# Altium PCB 1819_Emmeteur_DCF.PcbDoc (part 1 of 2)
Units mm, origin at the board's own origin, x right, y up, seen from the top; angles counter-clockwise.
Board outline 107.7 x 106.68 mm, 2 copper layers (Top Layer, Bottom Layer); 106 components, 76 nets, 407 pads, 175 vias.
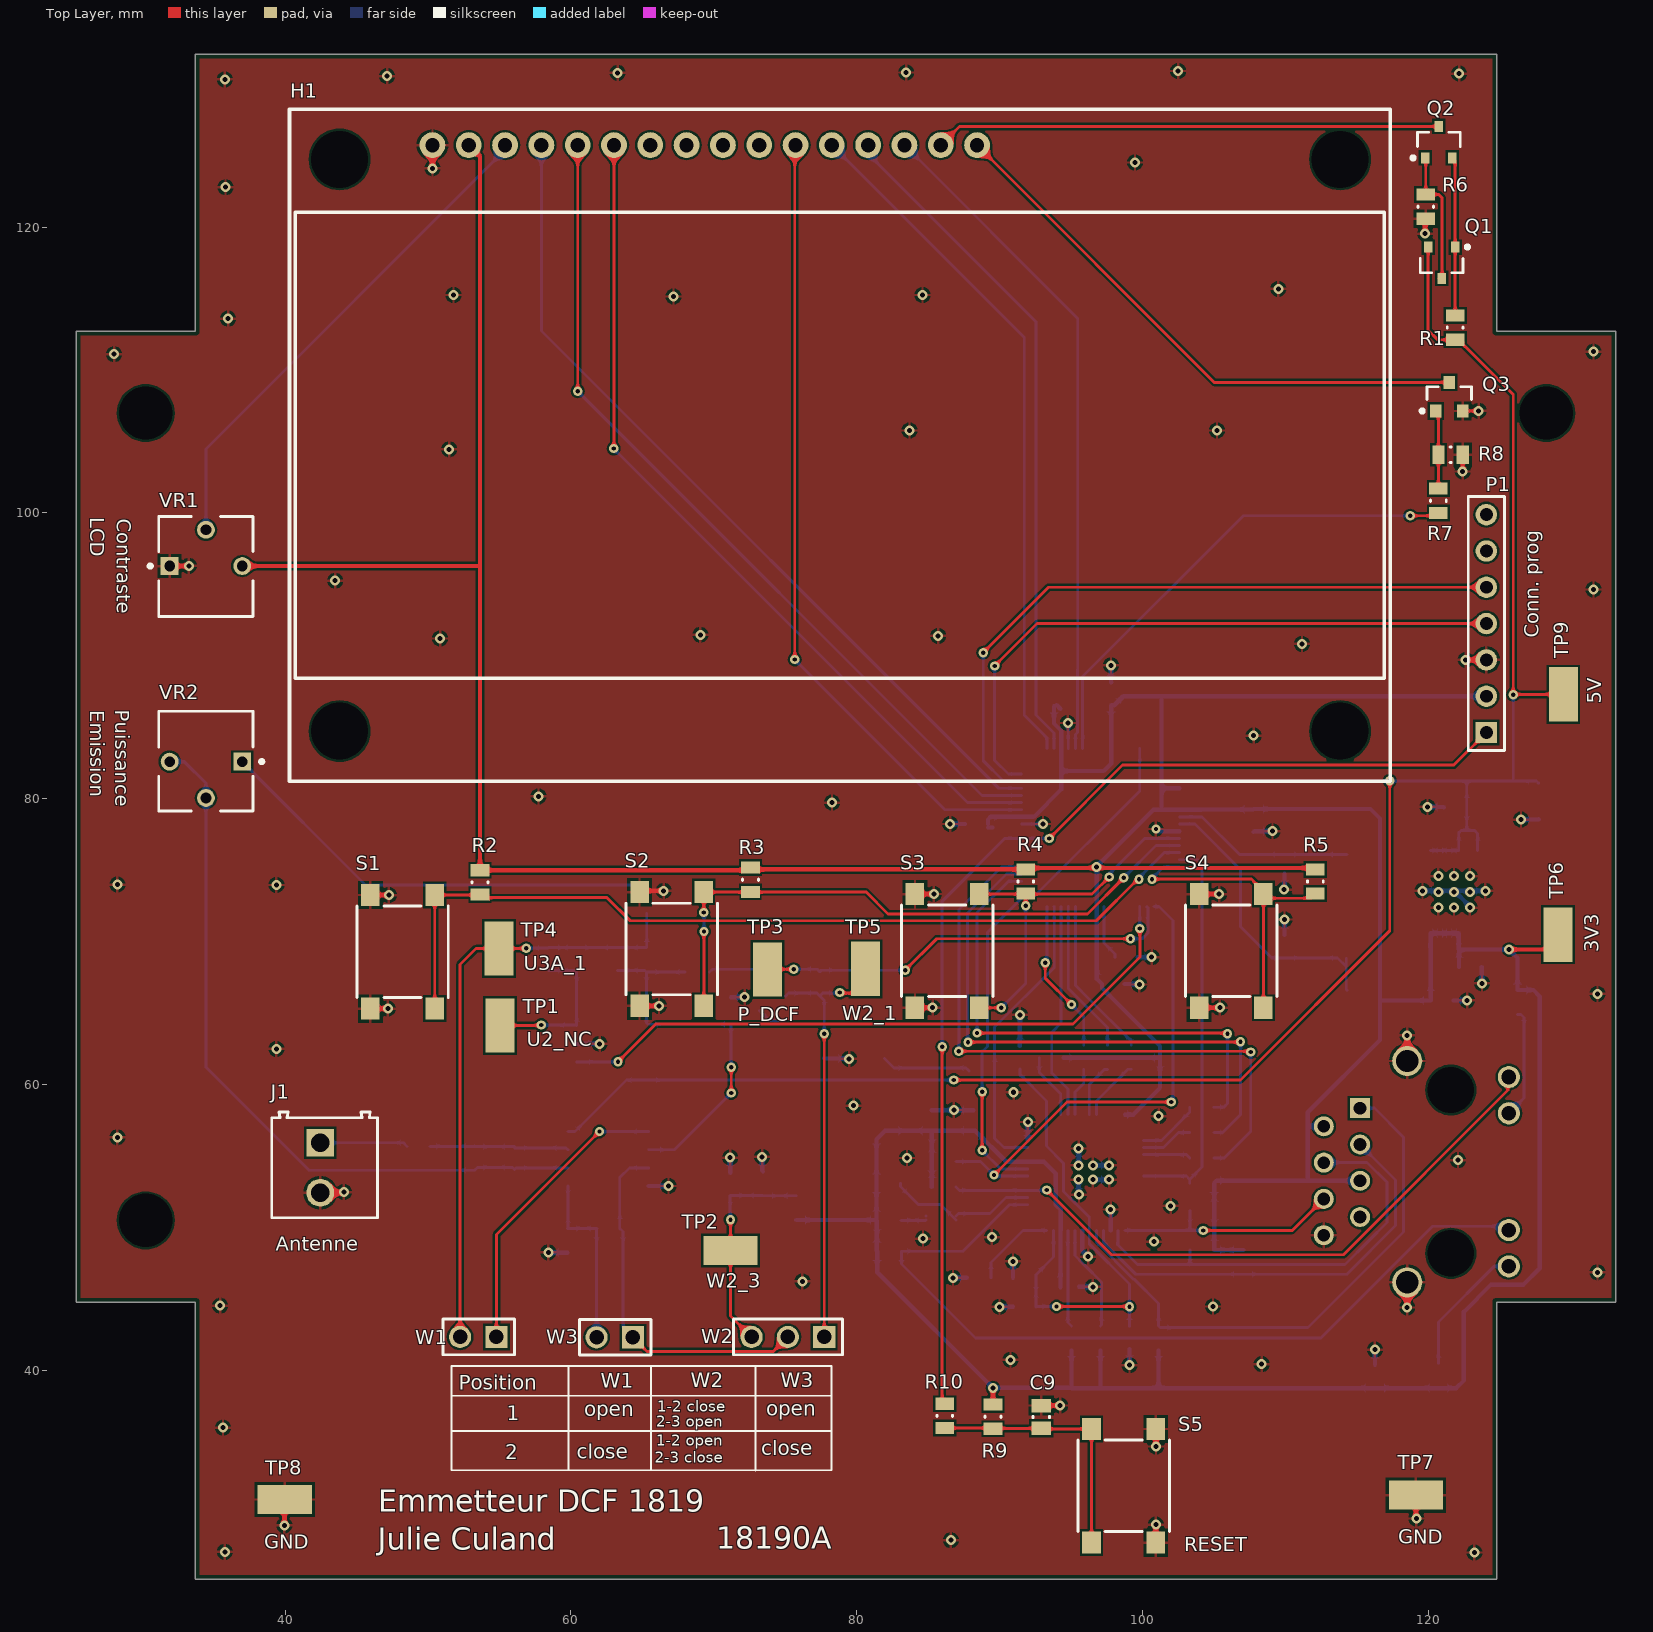
[diagram p0: Top Layer view]
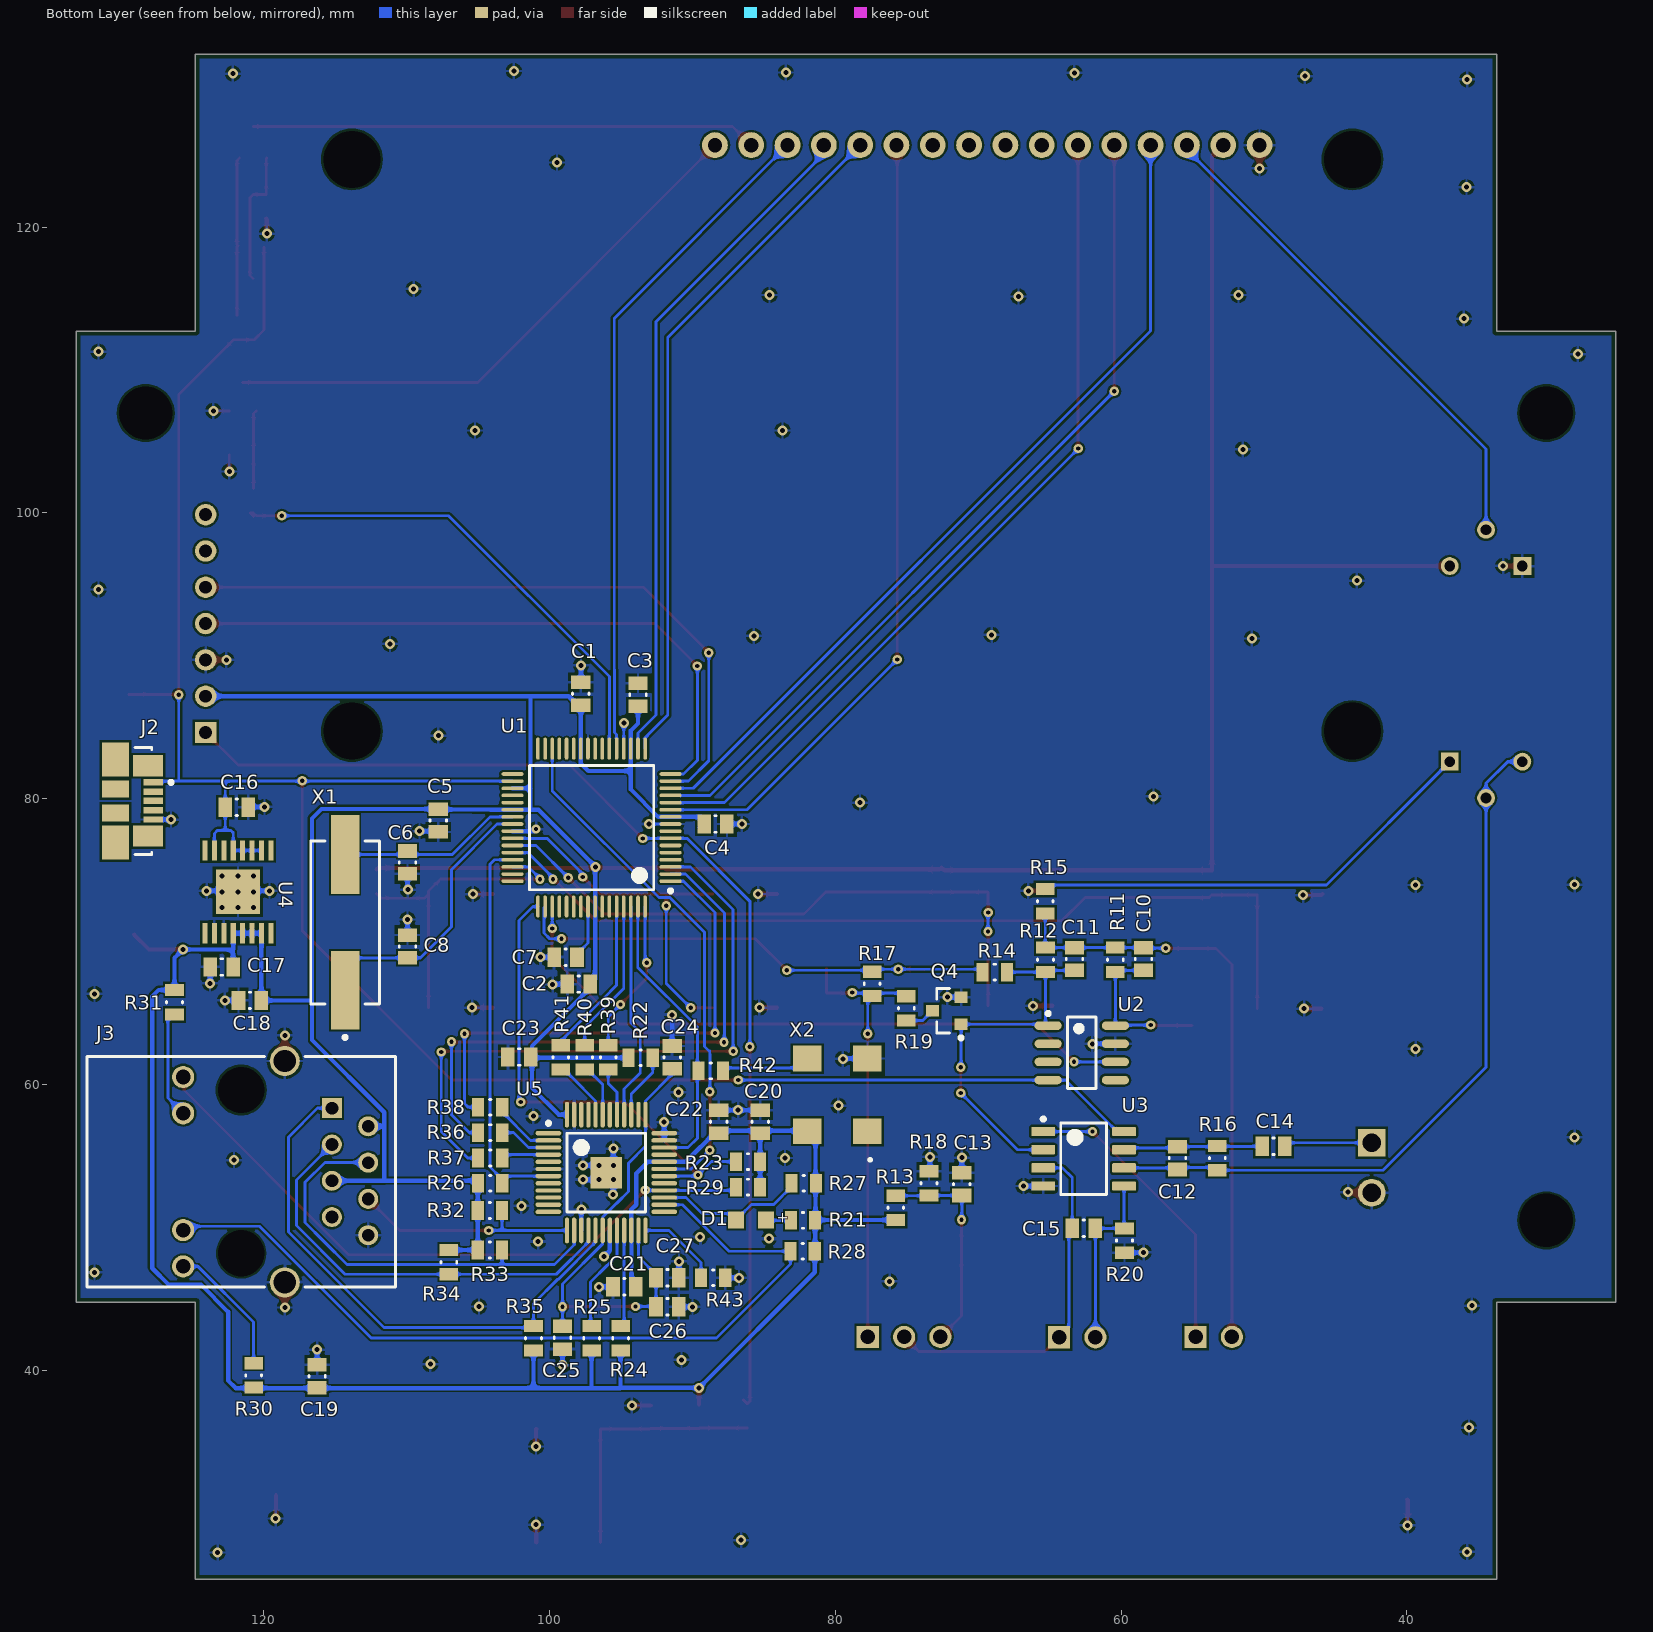
[diagram p1: Bottom Layer view, seen from below]

## Layer stack, top to bottom
Top Solder: solder mask 0.0102, Solder Resist, Dk 3.5
Top Layer: signal copper 0.0356
Dielectric 1: dielectric 0.32, FR-4, Dk 4.8
Bottom Layer: signal copper 0.0356
Bottom Solder: solder mask 0.0102, Solder Resist, Dk 3.5

## Board outline
124.765,112.7 124.765,132.08 33.735,132.08 33.735,112.7 25.4,112.7 25.4,44.78 33.735,44.78 33.735,25.4 124.765,25.4 124.765,44.78 133.1,44.78 133.1,112.7

## Design rules (kind name [scope] priority, off if disabled: settings)
BoardOutlineClearance [All] p1: gap=0.3 ignorepadtopadclearanceinfootprint=FALSE except(0: Arc-SplitContinuation Track-SplitContinuation SMDPad-SplitContinuation THPad-SplitContinuation Via-SplitContinuation Fill-SplitContinuation Poly-SplitContinuation Region-SplitContinuation Text-SplitContinuation)
Clearance Clearance-xPP-xTP-xTT [All] p1: gap=0.15 ignorepadtopadclearanceinfootprint=FALSE except(0: Arc-Hole Track-Hole SMDPad-Hole THPad-Hole Via-Hole Fill-Hole Poly-Hole Region-Hole Text-Hole)
ComponentClearance [All] p1: gap=0.25 collisioncheckmode=3 verticalgap=0.25 showdistances=FALSE
DiffPairsRouting [All] p1: maxlimit=0.25 minlimit=0.25 mostfreqgap=0.25 toplayer_minwidth=0.381 toplayer_maxwidth=0.381 toplayer_prefwidth=0.381 bottomlayer_minwidth=0.381 bottomlayer_maxwidth=0.381 bottomlayer_prefwidth=0.381 maxuncoupledlength=12.5
Height [All] p1: minheight=0 maxheight=25 prefheight=12.5
HoleSize HoleSize-PTH [All] p1: absolutevalues=TRUE maxlimit=10 minlimit=0.25 maxpercent=80.000 minpercent=20.000
HoleToHoleClearance [All] p1: gap=0.35 allowstackedmicrovias=TRUE
MinimumAnnularRing "Minimum IAR  >0.45mm" [((ObjectKind = 'Pad') OR (ObjectKind = 'Via')) And (Layer = 'MultiLayer') And (HoleDiameter > AsMM(0.45))] p1: minimumring=0.175 // minimum inner annular ring for pads > 0.45mm finished hole size
MinimumAnnularRing "Minimum IAR <=0.45mm" [((ObjectKind = 'Pad') OR (ObjectKind = 'Via')) And (Layer = 'MultiLayer') And (HoleDiameter <= AsMM(0.45))] p2: minimumring=0.175 // minimum inner annular ring for pads <= 0.45mm finished hole size
MinimumSolderMaskSliver [All] p1: minsoldermaskwidth=0.08
PlaneClearance PlaneClearance-IPI [All] p1: clearance=0.25
PlaneConnect [All] p1: planeconnectstyle=Relief reliefexpansion=0.175 reliefentries=4 reliefconductorwidth=0.2 reliefairgap=0.2
PolygonConnect PolygonConnect-xTW [All] p1: connectstyle=Relief reliefconductorwidth=0.2 reliefentries=4 polygonreliefangle="90 Angle" airgapwidth=0.2
RoutingCorners [All] p1: cornerstyle=45-Degree minsetback=2.5 maxsetback=2.5
RoutingVias RoutingViasES [All] p1: holewidth=0.3 width=0.65 viastyle="Through Hole" minholewidth=0.25 minwidth=0.61 maxholewidth=0.45 maxwidth=0.8 // finishet hole size <= 0.45mm
SilkToSilkClearance [All] p1: silktosilkclearance=0.2
SilkToSolderMaskClearance SilkscreenOverComponentPads [IsPad] p1: minsilkscreentomaskgap=0.2 clearancetoexposedcopper=TRUE
SolderMaskExpansion [All] p1: expansion=0
UnRoutedNet [All] p1: checkbadconnections=TRUE
Width Width-xTW [All] p1: maxlimit=1.5 minlimit=0.15 preferedwidth=0.2
18 further rules are at their usual default settings.

## Classes and differential pairs
component class Microcontroleur_Affichage: C1 C2 C3 C4 C5 C6 C7 C8 C9 H1 P1 Q1 Q2 Q3 R1 R2 R3 R4 R5 R6 R7 R8 R9 R10 S1 S2 S3 S4 S5 U1 VR1 X1
component class Ethernet: C18 C19 C20 C21 C22 C23 C24 C25 C26 C27 D1 J3 R21 R22 R23 R24 R25 R26 R27 R28 R29 R30 R31 R32 R33 R34 R35 R36 R37 R38 R39 R40 R41 R42 R43 U5 X2
component class DCF_ALIM_SWITCH_RESET: C10 C11 C12 C13 C14 C15 C16 C17 J1 J2 Q4 R11 R12 R13 R14 R15 R16 R17 R18 R19 R20 TP1 TP2 TP3 TP4 TP5 TP6 TP7 TP8 TP9 TP10 U2 U3 U4 VR2 W1 W2 W3

## Components (designator, comment, footprint, x,y, rotation, side; value= is the part's Value field where it differs from the comment)
C1 "Cap" C0805 97.803,87.338 r270 bottom value=100nF
C2 "Cap" C0805 97.955,67.031 r180 bottom value=100nF
C3 "Cap" C0805 93.802,87.274 r270 bottom value=100nF
C4 "Cap" C0805 88.379,78.228 r0 bottom value=100nF
C5 "Cap" C0805 107.772,78.473 r90 bottom value=100nF
C6 "Cap" C0805 109.931,75.54 r270 bottom value=22p
C7 "Cap" C0805 98.87,68.91 r0 bottom value=10uF
C8 "Cap" C0805 109.931,69.66 r90 bottom value=22p
C9 "Cap" C0805 92.913,36.741 r270 top value=100nF
C10 "Cap" C0805 58.436,68.784 r270 bottom value=330nF
C11 "Cap" C0805 63.262,68.784 r270 bottom value=100nF
C12 "Cap" C0805 56.058,54.855 r270 bottom value=100nF
C13 "Cap" C0805 71.143,53.039 r270 bottom value=100nF
C14 "Cap" C0805 49.339,55.677 r0 bottom value=100nF
C15 "Cap" C0805 62.624,49.936 r0 bottom value=220p
C16 "Cap" C0805 121.882,79.4 r0 bottom value=10uF
C17 "Cap" C0805 122.936,68.224 r180 bottom value=10uF
C18 "Cap" C0805 120.955,65.888 r180 bottom value=100nF
C19 "Cap" C0805 116.256,39.586 r270 bottom value=100nF
C20 "Cap" C0805 85.245,57.405 r270 bottom value=100nF
C21 "Cap" C0805 94.755,45.847 r180 bottom value=100nF
C22 "Cap" C0805 88.163,57.405 r270 bottom value=100nF
C23 "Cap" C0805 102.119,61.925 r180 bottom value=100nF
C24 "Cap" C0805 91.415,61.899 r270 bottom value=100nF
C25 "Cap" C0805 99.085,42.292 r90 bottom value=100nF
C26 "Cap" C0805 91.741,44.446 r0 bottom value=100nF
C27 "Cap" C0805 91.741,46.478 r0 bottom value=10uF
D1 "Yellow" WL-SMCW_0805 85.895,50.521 r180 bottom
H1 "LCD_NHD_0420AZ" NHD-0420AZ-FSW-GBW-33V3 50.317,125.73 r0 top
J1 "691214110002" 691214110002 42.769,54.181 r270 top
J2 "47346-0001" MOLX-47346-0001-5_V 130.171,79.843 r270 bottom
J3 "SI-60062-F" BELF-SI-60062-F_V 121.568,53.903 r270 bottom
P1 "Header 7" HDR1X7 124.054,84.633 r90 top
Q1 "BC857B" INF-SOT23_L 120.929,117.5 r270 top
Q2 "BC857B" INF-SOT23_L 120.726,125.933 r90 top
Q3 "IRLML2402" INTR-IRLML2402TRPBF-3_V 121.463,108.128 r90 top
Q4 "IRLML2402TRPBF" INTR-IRLML2402TRPBF-3_V 72.199,65.167 r0 bottom
R1 "39R" RESC0805(2012)_L 121.869,112.966 r270 top
R2 "10k" RESC0805(2012)_L 53.645,74.143 r270 top
R3 "10k" RESC0805(2012)_L 72.568,74.332 r270 top
R4 "10k" RESC0805(2012)_L 91.823,74.205 r270 top
R5 "10k" RESC0805(2012)_L 112.092,74.205 r270 top
R6 "1k8" RESC0805(2012)_L 119.812,121.426 r90 top
R7 "200R" RESC0805(2012)_L 120.701,100.85 r270 top
R8 "100k" RESC0805(2012)_L 121.551,104.064 r180 top
R9 "4k7" RESC0805(2012)_L 89.535,36.766 r270 top
R10 "470R" RESC0805(2012)_L 86.157,36.816 r90 top
R11 "3.3k" RESC0805(2012)_L 60.404,68.734 r90 bottom
R12 "10k" RESC0805(2012)_L 65.294,68.734 r90 bottom
R13 "1k" RESC0805(2012)_L 75.768,51.372 r90 bottom
R14 "10k" RESC0805(2012)_L 68.848,67.869 r180 bottom
R15 "13k" RESC0805(2012)_L 65.313,72.822 r90 bottom
R16 "10k" RESC0805(2012)_L 53.264,54.855 r90 bottom
R17 "3k" RESC0805(2012)_L 77.419,67.044 r270 bottom
R18 "1k" RESC0805(2012)_L 73.443,53.089 r90 bottom
R19 "1k" RESC0805(2012)_L 75.023,65.333 r270 bottom
R20 "100k" RESC0805(2012)_L 59.766,49.086 r270 bottom
R21 "240R" RESC0805(2012)_L 82.259,50.495 r0 bottom
R22 "2k2" RESC0805(2012)_L 93.624,61.874 r180 bottom
R23 "1k5" RESC0805(2012)_L 86.105,54.606 r0 bottom
R24 "2k2" RESC0805(2012)_L 95.021,42.248 r90 bottom
R25 "2k2" RESC0805(2012)_L 97.053,42.248 r90 bottom
R26 "2k2" RESC0805(2012)_L 104.149,53.094 r180 bottom
R27 "2k2" RESC0805(2012)_L 82.208,53.094 r0 bottom
R28 "2k2" RESC0805(2012)_L 82.284,48.336 r0 bottom
R29 "2k2" RESC0805(2012)_L 86.105,52.828 r0 bottom
R30 "240" RESC0805(2012)_L 120.701,39.649 r90 bottom
R31 "240" RESC0805(2012)_L 126.234,65.762 r270 bottom
R32 "51" RESC0805(2012)_L 104.165,51.19 r180 bottom
R33 "51" RESC0805(2012)_L 104.165,48.426 r180 bottom
R34 "51" RESC0805(2012)_L 107.035,47.576 r270 bottom
R35 "51" RESC0805(2012)_L 101.117,42.248 r90 bottom
R36 "33R" RESC0805(2012)_L 104.149,56.638 r180 bottom
R37 "33R" RESC0805(2012)_L 104.149,54.86 r180 bottom
R38 "33R" RESC0805(2012)_L 104.149,58.416 r180 bottom
R39 "33R" RESC0805(2012)_L 95.885,61.9 r270 bottom
R40 "33R" RESC0805(2012)_L 97.536,61.9 r270 bottom
R41 "33R" RESC0805(2012)_L 99.212,61.9 r270 bottom
R42 "33R" RESC0805(2012)_L 88.709,60.96 r180 bottom
R43 "4k87" RESC0805(2012)_L 88.544,46.482 r180 bottom
S1 "430152095836" 430152095836 48.224,69.287 r90 top
S2 "430152095836" 430152095836 67.056,69.487 r90 top
S3 "430152095836" 430152095836 86.324,69.35 r90 top
S4 "430152095836" 430152095836 106.208,69.35 r90 top
S5 "430152043836" 430152043836 98.679,31.928 r270 top
TP1 "5019" KSTN-5019_V 55.042,64.135 r90 top
TP2 "5019" KSTN-5019_V 71.171,48.387 r0 top
TP3 "5019" KSTN-5019_V 73.762,68.047 r90 top
TP4 "5019" KSTN-5019_V 54.966,69.52 r90 top
TP5 "5019" KSTN-5019_V 80.62,68.097 r90 top
TP6 "5019" KSTN-5019_V 129.057,70.485 r270 top
TP7 "5019" KSTN-5019_V 119.126,31.267 r0 top
TP8 "5019" KSTN-5019_V 39.98,30.963 r0 top
TP9 "5019" KSTN-5019_V 129.438,87.3 r270 top
U1 "PIC32MX795F512HT-80V/PT" TQFP-PT64_L 97.053,77.978 r0 bottom
U2 "TS12A4515" TI-D8_L 62.754,62.218 r180 bottom
U3 "OPA2347UA" D0008A_M 62.623,54.804 r180 bottom
U4 "MAX1793" MAX1793 121.793,73.482 r270 bottom
U5 "DP83848VYB" DP83848 96.021,53.844 r180 bottom
VR1 "10k" BOUR-3362P 34.468,96.241 r0 top
VR2 "Pemiss_10k" BOUR-3362P 34.468,82.626 r180 top
W1 "Jumper" Jumper_2POS 52.248,42.342 r180 top
W2 "Jumper_3pos" Jumper_3pos 75.184,42.342 r180 top
W3 "Jumper" Jumper_2POS 61.798,42.316 r180 top
X1 "8MHz" ECS-80-18-5PX-TR_V 114.3,71.348 r90 bottom
X2 "7W-50.000MBA-T" TXC-L500W700H130-4_V 79.849,59.278 r90 bottom

## Footprints (in the part's own frame and the unit in brackets; to place one, negate y for a bottom-side part, rotate by r counter-clockwise, add the part's x,y. Pads: shape width x height; smd on the part's side, far side on the other; paste and mask are expansions set on the pad)
430152043836 [mm] "SMD Tact Switch, body 6x6mm"
  rect 1.55x1.3 smd: 1(-3.975,2.25) 2(-3.975,-2.25) 3(3.975,2.25) 4(3.975,-2.25)
  silkscreen extent -3.2,-3.2 3.2,3.2, body extent -4.5,-3.1 4.5,3.1, height 4.33
430152095836 [mm] "SMD Tact Switch, body 6x6mm"
  rect 1.55x1.3 smd: 1(-3.975,2.25) 2(-3.975,-2.25) 3(3.975,2.25) 4(3.975,-2.25)
  silkscreen extent -3.2,-3.2 3.2,3.2, body extent -4.5,-3.1 4.5,3.1, height 9.53
691214110002 [mm] "3.50 mm Horizontal Entry Modular, 2p"
  rect 1.95x1.95 hole 1.3: 1(-1.75,-0.3)
  round 1.95 hole 1.3: 2(1.75,-0.3)
  silkscreen extent -3.9,-3.7 3.5,3.7, body extent -3.95,-3.7 3.5,3.7, height 8.55
BELF-SI-60062-F_V [mm] "MagJack, 14-Leads, Body 21.59x16.13mm"
  rect 1.4x1.4 hole 0.89: 1(-4.445,6.35)
  round 1.4 hole 0.89: 2(-3.175,8.89) 3(-1.905,6.35) 4(3.175,6.35) 5(-0.635,8.89) 6(0.635,6.35) 7(1.905,8.89) 8(4.445,8.89)
  round 1.55 hole 1.02: 9(-6.625,-4.06) 10(-4.085,-4.06) 11(4.085,-4.06) 12(6.625,-4.06)
  round 2.95 hole 3.25 unplated: MH1(-5.715,0) MH2(5.715,0)
  round 2.1 hole 1.57: S1(-7.745,3.05) S2(7.745,3.05)
  silkscreen extent -8.07,-10.79 8.06,10.8, body extent -8.06,-10.79 8.06,10.8, height 13.84
BOUR-3362P [mm] "THD, 3-Leads, Body 6.6x6.99mm, Pitch 2.54mm"
  rect 1.25x1.25 hole 0.75: 1(-2.54,0.035)
  round 1.25 hole 0.75: 2(0,2.575) 3(2.54,0.035)
  silkscreen extent -4.02,-3.49 3.3,3.49, body extent -3.3,-3.49 3.3,3.49, height 4.95
C0805 [mm]
  rect 0.95x1.35 smd: 1(-0.8,0) 2(0.8,0)
  silkscreen extent -0.05,-0.58 0.05,0.57, body extent -1.1,-0.72 1.1,0.72, height 1.45
D0008A_M [mm] "SOIC, 8-Leads, Body 5x4mm, Pitch 1.27mm, IPC Low Density"
  rrect15% 1.65x0.65 smd: 1(-2.825,1.905) 2(-2.825,0.635) 3(-2.825,-0.635) 4(-2.825,-1.905) 5(2.825,-1.905) 6(2.825,-0.635) 7(2.825,0.635) 8(2.825,1.905)
  silkscreen extent -2.95,-2.5 1.6,2.9, body extent -3,-2.45 3,2.45, height 1.63
DP83848 [mm] "Thin QFP, 48-Leads, Body 7x7mm, Pitch 0.5mm, Exposed Pad, IPC Medium Density"
  oval 1.8x0.3 smd: 1(-4.05,2.75) 2(-4.05,2.25) 3(-4.05,1.75) 4(-4.05,1.25) 5(-4.05,0.75) 6(-4.05,0.25) 7(-4.05,-0.25) 8(-4.05,-0.75) 9(-4.05,-1.25) 10(-4.05,-1.75) 11(-4.05,-2.25) 12(-4.05,-2.75) 25(4.05,-2.75) 26(4.05,-2.25) 27(4.05,-1.75) 28(4.05,-1.25) 29(4.05,-0.75) 30(4.05,-0.25) 31(4.05,0.25) 32(4.05,0.75) 33(4.05,1.25) 34(4.05,1.75) 35(4.05,2.25) 36(4.05,2.75)
  oval 0.3x1.8 smd: 13(-2.75,-4.05) 14(-2.25,-4.05) 15(-1.75,-4.05) 16(-1.25,-4.05) 17(-0.75,-4.05) 18(-0.25,-4.05) 19(0.25,-4.05) 20(0.75,-4.05) 21(1.25,-4.05) 22(1.75,-4.05) 23(2.25,-4.05) 24(2.75,-4.05) 37(2.75,4.05) 38(2.25,4.05) 39(1.75,4.05) 40(1.25,4.05) 41(0.75,4.05) 42(0.25,4.05) 43(-0.25,4.05) 44(-0.75,4.05) 45(-1.25,4.05) 46(-1.75,4.05) 47(-2.25,4.05) 48(-2.75,4.05)
  rect 2.2x2.2 smd: 49(0,0)
  silkscreen extent -4.18,-2.75 2.75,3.57, body extent -3.5,-3.5 3.5,3.5, height 1.6
ECS-80-18-5PX-TR_V [mm] "SMD, 2-Leads, Body 11.4x4.8mm, Height 4.3mm"
  rect 5.5x2 smd: 1(-4.75,0) 2(4.75,0)
  silkscreen extent -8.17,-2.4 5.7,2.4, body extent -6.6,-2.4 6.6,2.4, height 4.3
HDR1X7 [mm] "Connector; Header; 7 Position"
  rect 1.5x1.5 hole 0.9: 1(0,0)
  round 1.5 hole 0.9: 2(2.54,0) 3(5.08,0) 4(7.62,0) 5(10.16,0) 6(12.7,0) 7(15.24,0)
  silkscreen extent -1.27,-1.27 16.51,1.27
INF-SOT23_L [mm] "SOT23, 3-Leads, Body 2.9x1.3 mm, Pitch 0.95 mm, IPC High Density"
  rect 0.75x0.6 smd: 1(-1.1,0.95) 2(-1.1,-0.95) 3(1.1,0)
  silkscreen extent -1.22,-1.5 0.7,1.93, body extent -0.7,-1.5 0.7,1.5, height 1.1
INTR-IRLML2402TRPBF-3_V [mm] "SOT23, 3-Leads, Body 3.05x1.4mm, Pitch 0.95mm"
  rect 0.9x0.8 smd: 1(-1,0.95) 2(-1,-0.95) 3(1,0)
  silkscreen extent -1.12,-1.55 0.7,2.02, body extent -0.7,-1.52 0.7,1.53, height 1.11
Jumper_2POS [mm]
  rect 1.55x1.55 hole 1.02: 1(-2.54,0)
  round 1.55 hole 1.02: 2(0,0)
  silkscreen extent -3.81,-1.25 1.2,1.25, body extent -3.81,-1.24 1.21,1.24, height 0.25
Jumper_3pos [mm]
  rect 1.55x1.55 hole 1.02: 1(-2.54,0)
  round 1.55 hole 1.02: 2(0,0) 3(2.54,0)
  silkscreen extent -3.81,-1.24 3.81,1.24, body extent -3.81,-1.24 3.81,1.24, height 8.38
KSTN-5019_V [mm] "Test Point, 1-Leads, Body 3.81x2.03mm"
  rect 3.8x2.03 smd: 1(0,0)
  body extent -1.9,-1.01 1.9,1.02, height 2.29
MAX1793 [mil]
  rect 56x14 smd: 1(-114,91) 2(-114,65) 3(-114,39) 4(-114,13) 5(-114,-13) 6(-114,-39) 7(-114,-65) 8(-114,-91) 9(114,-91) 10(114,-65) 11(114,-39) 12(114,-13) 13(114,13) 14(114,39) 15(114,65) 16(114,91)
  rect 122x122 smd: 17(0,0)
MOLX-47346-0001-5_V [mm] "SMD, 5-Leads, Body 7.5x5mm, Pitch 0.65mm"
  rect 0.45x1.38 smd: 1(-1.3,2.46) 2(-0.65,2.46) 3(0,2.46) 4(0.65,2.46) 5(1.3,2.46)
  rect 1.475x2.1 smd: 6(-2.462,2.1) 7(2.463,2.1)
  rect 2.375x1.9 smd: 8(-2.912,-0.2) 11(2.912,-0.2)
  rect 1.175x1.9 smd: 9(-0.838,-0.2) 10(0.838,-0.2)
  silkscreen extent -3.75,1.16 3.75,3.82, body extent -3.99,-2.78 3.99,2.65, height 2.69
NHD-0420AZ-FSW-GBW-33V3 [mm] "Ecran LCD 3V3"
  round 1.8 hole 1: 1(0,0) 2(2.54,0) 3(5.08,0) 4(7.62,0) 5(10.16,0) 6(12.7,0) 7(15.24,0) 8(17.78,0) 9(20.32,0) 10(22.86,0) 11(25.4,0) 12(27.94,0) 13(30.48,0) 14(33.02,0) 15(35.56,0) 16(38.1,0)
  round 1.524 hole 4: 17(-6.5,-41) 17(-6.5,-1) 17(63.5,-41) 17(63.5,-1)
  silkscreen extent -10,-44.5 67,2.5
RESC0805(2012)_L [mm]
  rect 0.85x1.3 smd: 1(-0.85,0) 2(0.85,0)
  silkscreen extent -0.05,-0.55 0.05,0.55, body extent -1.1,-0.67 1.1,0.68, height 0.7
TI-D8_L [mm] "SOIC, 8-Leads, Body 4.9x3.9mm, Pitch 1.27mm, IPC High Density"
  oval 1.9x0.6 smd: 1(-2.35,1.905) 2(-2.35,0.635) 3(-2.35,-0.635) 4(-2.35,-1.905) 5(2.35,-1.905) 6(2.35,-0.635) 7(2.35,0.635) 8(2.35,1.905)
  silkscreen extent -2.48,-2.5 1,2.88, body extent -2,-2.5 2,2.5, height 1.75
TQFP-PT64_L [mm] "Thin QFP, 64-Leads, Body 10x10mm, Pitch 0.5mm, IPC High Density"
  oval 1.55x0.25 smd: 1(-5.525,3.75) 2(-5.525,3.25) 3(-5.525,2.75) 4(-5.525,2.25) 5(-5.525,1.75) 6(-5.525,1.25) 7(-5.525,0.75) 8(-5.525,0.25) 9(-5.525,-0.25) 10(-5.525,-0.75) 11(-5.525,-1.25) 12(-5.525,-1.75) 13(-5.525,-2.25) 14(-5.525,-2.75) 15(-5.525,-3.25) 16(-5.525,-3.75) 33(5.525,-3.75) 34(5.525,-3.25) 35(5.525,-2.75) 36(5.525,-2.25) 37(5.525,-1.75) 38(5.525,-1.25) 39(5.525,-0.75) 40(5.525,-0.25) 41(5.525,0.25) 42(5.525,0.75) 43(5.525,1.25) 44(5.525,1.75) 45(5.525,2.25) 46(5.525,2.75) 47(5.525,3.25) 48(5.525,3.75)
  oval 0.25x1.55 smd: 17(-3.75,-5.525) 18(-3.25,-5.525) 19(-2.75,-5.525) 20(-2.25,-5.525) 21(-1.75,-5.525) 22(-1.25,-5.525) 23(-0.75,-5.525) 24(-0.25,-5.525) 25(0.25,-5.525) 26(0.75,-5.525) 27(1.25,-5.525) 28(1.75,-5.525) 29(2.25,-5.525) 30(2.75,-5.525) 31(3.25,-5.525) 32(3.75,-5.525) 49(3.75,5.525) 50(3.25,5.525) 51(2.75,5.525) 52(2.25,5.525) 53(1.75,5.525) 54(1.25,5.525) 55(0.75,5.525) 56(0.25,5.525) 57(-0.25,5.525) 58(-0.75,5.525) 59(-1.25,5.525) 60(-1.75,5.525) 61(-2.25,5.525) 62(-2.75,5.525) 63(-3.25,5.525) 64(-3.75,5.525)
  silkscreen extent -5.65,-4.35 4.35,4.55, body extent -5,-5 5,5, height 1.6
TXC-L500W700H130-4_V [mm] "Oscillator, Body 5.0x7.0mm, Height 1.3mm"
  rect 1.8x2 smd: 1(-2.54,-2.1) 2(2.54,-2.1) 3(2.54,2.1) 4(-2.54,2.1)
  silkscreen extent -4.64,-2.39 -4.45,-2.19, body extent -3.5,-2.5 3.5,2.5, height 1.3
WL-SMCW_0805 [mm] "SMD Mono-color Chip LED, body 2.0x1.25mm"
  rect 1.1x1.2 smd: 1(-1.05,0) 2(1.05,0)
  body extent -1,-0.63 1,0.62, height 0.7

## Part data
C1 C2 C3 C4 C5 C6 C7 C8 C9 C10 C11 C12 C13 C14 C15 C16 C17 C18 C19 C20 C21 C22 C23 C24 C25 C26 C27: "Capacitor", LatestRevisionDate=17-Jul-2002, LatestRevisionNote="Re-released for DXP Platform.", PackageDescription="Radial Cap, Thru-Hole; 2 Leads; 0.3 in Pin Spacing", PackageReference=RAD-0.3, Published=8-Jun-2000, Publisher="Altium Limited"
D1: library part 150080YS75000, "SMT Mono-color Chip LED Waterclear WL-SMCW, size 0805, Yellow, 2 V, 140 deg, 120 mcd", Forward Voltage="2 V", Operating Temperature="-40 to 85 degC", Chip Technology=AlInGaP, ComponentLink1Description=Manufacturer, ComponentLink1URL=http://www.we-online.de, ComponentLink2Description=Datasheet, ComponentLink2URL=https://katalog.we-online.de/led/datasheet/150080YS75000.pdf, Dominant Wavelength="590 nm", Emitting Color=Yellow, Luminous Intensity="120 mcd", Mounting Technology=SMT, Packaging="Tape and Reel", Part Number=150080YS75000, Peak Wavelength="595 nm", Published Date="November 2018", Publisher="Wurth Elektronik", Size=0805, Viewing Angle="140 deg"
H1: library part NHD-0420AZ-FSW-GBW-33V3
J1: "Serie 2141 - 3.50 mm Horizontal Entry Modular with Rising Cage Clamp WR-TBL, 2 pin", Operating Temperature="-40 to 105 degC", ComponentLink1Description=Manufacturer, ComponentLink1URL=http://www.we-online.de, ComponentLink2Description=Datasheet, ComponentLink2URL=http://katalog.we-online.de/em/datasheet/6912141100xx.pdf, Mounting Technology=THT, Packaging=Box, Part Number=691214110002, Pin Number=2, Pitch="3.50 mm", Published Date="June 2018", Publisher="Wurth Elektronik"
J2: library part CMP-2000-05246-1, "Micro-USB B Receptacle with Flange, -30 to 85 degC, 5-Pin SMD, RoHS, Tape and Reel", Color=Black, Manufacturer=Molex, Maximum Current Rating=1.8/ContactA, Maximum Voltage Rating=30VAC, Operating Temperature=-30to85C, Body Orientation=RightAngle, Contact Material=CopperAlloy, Contact Plating=GoldOverPalladiumNickelOverNickel, Datasheet URL=https://datasheet.ciiva.com/30075/304740473460001-io-nectors-30075527.pdf, Datasheet Version=Dec-13, Dimension=7.8x5.43x2.94mm, Gender=RCP, Housing Material=LiquidCrystalPolymer, Manufacturer URL=http://www.molex.com/, Mounting=SurfaceMount, Number of Contacts=5, Number of Ports=1, Number of Terminals=5, Packaging=EmbossedTapeandReel, Part No=47346-0001, Pitch=0.65mm, RoHS=Yes, Termination Method=Solder, Type=MicroUSBTypeB
J3: library part CMP-2000-07059-1, "1 Port RJ45 Magjack Connector with Yellow and Green LED, 10/100 Base-T, 12-Pin THD, RoHS, Tray", Manufacturer="Bel Fuse", Package Description="12-Pin Through Hole Device, Body 21.59 x 16.13 mm", Connector Type=RJ45, Contact Material=CopperAlloy, Contact Plating=Gold, Datasheet URL=http://belfuse.com/pdfs/SI-60062-F.pdf, Datasheet Version="Rev. B0, 09/2008", Depth=21.59mm, Gender=Female, Length=15.21mm, Manufacturer URL=http://belfuse.com/, Mounting Technology=ThroughHole, Mounting Type=ThroughHole, Number of Ways=8P4C, Orientation=Straight, Package Reference=SI-60062-F, Series=MagJack, Shield Type=STP, Width=17.98mm
P1: "Header, 7-Pin", LatestRevisionDate=17-Jul-2002, LatestRevisionNote="Re-released for DXP Platform.", Publisher="Altium Limited"
Q1 Q2: library part CMP-1177-00036-1, "PNP Silicon AF Transistor, 45 V VCEO, 100 mA IC, SOT23, Reel, Green", Manufacturer=Infineon, ComponentLink1Description="Manufacturer URL", ComponentLink1URL=http://www.infineon.com/, ComponentLink2Description=Datasheet, ComponentLink2URL=http://www.infineon.com/dgdl/bc857series_bc858series_bc859series_bc860series.pdf?folderId=db3a304314dca389011541d30fa21656&fileId=db3a304314dca389011541da0e3a1661, ComponentLink3Description="Package Specification", ComponentLink3URL=http://www.infineon.com/dgdl/SOT23-Package_Overview.pdf?folderId=db3a30431936bc4b0119532290053c66&fileId=db3a30431936bc4b0119533468123c85, fT (typ)="250 MHz", Green=TRUE, IBM (max)="200 mA", IC (max)="100 mA", ICBO (max)="15 nA", ICM (max)="200 mA", Mounting Technology="Surface Mount", PackageDescription="3-Pin Small Outline Transistor Package, 1.3 x 2.9 mm Body, 0.95 mm Pitch", PackageReference=SOT23, PackageVersion=Apr-08, Packing=Reel, Partnumber=BC857B, Polarity=PNP, Ptot (max)="330 mW", VCBO (max)="50 V", VCEO (max)="45 V", VEBO (max)="5 V"
Q3 Q4: library part CMP-2000-05155-1, "HEXFET(R) Power MOSFET, N-Channel, 20 V, 1.2 A, 3-Pin SOT-23, RoHS, Tape and Reel", Continuous Drain Current Id=1.2A, Current Temperature=25degC, Drain Source Voltage Vds=20V, Junction Temperature Tj Min=-55degC, Manufacturer="International Rectifier", On Resistance Rds(on)=250mohm, Operating Temperature Range=-55degCto+150degC, Package / Case=SOT-23, Power Dissipation Pd=540mW, Pulse Current Idm=7.4A, Rds(on) Test Voltage Vgs=4.5V, Threshold Voltage Vgs Typ=700mV, Current Id Max=1.2A, Datasheet URL=https://datasheet.ciiva.com/29326/162826-da-01-en-irlml-2402tr-29326791.pdf, Datasheet Version=Jan-03, External Depth=2.5mm, External Length / Height=1.12mm, External Width=3.05mm, Full Power Rating Temperature=25degC, Manufacturer URL=http://internationalrectifier.com/, No. of Pins=3, No. of Transistors=1, Reel Quantity=3000, SMD Marking=1A, SVHC=NoSVHC(19-Dec-2012), Tape Width=8mm, Termination Type=SMD, Transistor Case Style=SOT-23, Transistor Polarity=NChannel, Voltage Vds Typ=20V, Voltage Vgs Max=700mV, Voltage Vgs Rds on Measurement=4.5V, Voltage Vgs th Min=700mV
R1 R2 R3 R4 R5 R6 R7 R8 R9 R10 R11 R12 R13 R14 R15 R16 R17 R18 R19 R20 R21 R22 R23 R24 R25 R26 R27 R28 R29 R30 R31 R32 R33 R34 R35 R36 R37 R38 R39 R40 R41 R42 R43: library part Resistance
S1 S2 S3 S4: "6x6mm SMD Tact Switch WS-TASV, height 9.5 mm, 360 gf", Operating Temperature="-40 to +85 degC", Rated Current="50 mA", Rated Voltage="12 VDC", ComponentLink1Description=Manufacturer, ComponentLink1URL=http://www.we-online.de, ComponentLink2Description=Datasheet, ComponentLink2URL=http://katalog.we-online.de/em/datasheet/4301x2xxx8x6.pdf, Life Cycle=200000, Operation Force="360 gf", Part Number=430152095836, Published Date="Nov. 2017", Publisher="Wurth Elektronik", Size="6x6x9.5 mm"
S5: "6x6mm SMD Tact Switch WS-TASV, height 4.3 mm, 360 gf", Operating Temperature="-40 to +85 degC", Rated Current="50 mA", Rated Voltage="12 VDC", ComponentLink1Description=Manufacturer, ComponentLink1URL=http://www.we-online.de, ComponentLink2Description=Datasheet, ComponentLink2URL=http://katalog.we-online.de/em/datasheet/4301x2xxx8x6.pdf, Life Cycle=200000, Operation Force="360 gf", Part Number=430152043836, Published Date="Nov. 2017", Publisher="Wurth Elektronik", Size="6x6x4.3 mm"
TP1 TP2 TP3 TP4 TP5 TP6 TP7 TP8 TP9: library part CMP-1672-00008-1, "Test Point, 1 Position SMD, RoHS, Tape and Reel", Package Quantity=1000, ComponentLink1Description="Manufacturer URL", ComponentLink1URL=http://www.keyelco.com/, ComponentLink2Description=Datasheet, ComponentLink2URL=http://www.keyelco.com/product-pdf.cfm?p=1357, Contact Plating=Silver, DatasheetVersion=03/2014, Mount="Surface Mount", Mounting Technology="Surface Mount", PackageDescription="1-Pin Surface Mount Device, Body 3.81 x 2.03 mm", PackageReference=5019, Packaging="Tape and Reel", Pins=1, RoHSCompliant=True
U1: library part CMP-0048-00370-1, "High Performance 80 MHz MIPS-Based 32-Bit Flash Microcontroller with USB, CAN and Ethernet, 512KB Program Memory, 64-pin TQFP, V-Temp, Tape and Reel", Code_JEDEC=MS-026, ComponentLink1Description=Datasheet, ComponentLink1URL=http://ww1.microchip.com/downloads/en/DeviceDoc/61156G.pdf, ComponentLink2Description="Packaging Specification", ComponentLink2URL=http://ww1.microchip.com/downloads/en/PackagingSpec/en012702.pdf, ComponentLink3Description="Microchip.com Home", ComponentLink3URL=http://www.microchip.com/, DatasheetVersion="revG, May-2011", PackageDescription="64-Lead Thin Plastic Quad Flat Pack (PT) - 10x10x1mm Body, 2.00mm [TQFP]", PackageReference=TQFP-PT64, PackageVersion="revBB, Aug-2009"
U2: "Dual Supply, Low On-State Resistance SPST CMOS Analog Switch, -40 to 85 degC, 8-Pin SOIC (D8), RoHS, Tube", Manufacturer="Texas Instruments", Partnumber=TS12A4516D, Temperature Range="-40 to 85 degC", Channels=1, ComponentLink1Description="Manufacturer URL", ComponentLink1URL=http://www.ti.com/, ComponentLink2Description=Datasheet, ComponentLink2URL=http://www.ti.com/lit/ds/symlink/ts12a4516.pdf, ComponentLink3Description="Package Specification", ComponentLink3URL=http://www.ti.com/lit/ml/msoi002j/msoi002j.pdf, DatasheetVersion=SCDS236B, Mounting Technology="Surface Mount", PackageDescription="8-Pin Plastic Small Outline, Body 4.9 x 3.9 mm, Pitch 1.27 mm", PackageReference=D0008A, PackageVersion=4040047-3/M, Packing=Tube, RoHS=TRUE, Ron="25 Ohm Max.", Switch Configuration=SPST
U3: library part CMP-0272-00425-3, "MicroPower, Rail-to-Rail Operational Amplifier, 2.3 to 5.5 V, -55 to 125 degC, 8-pin SOIC (D8), Green (RoHS & no Sb/Br)", Manufacturer="Texas Instruments", Rating=Catalog, Total Supply Voltage(Max)(+5V is 5, +/-5V is 10)=5.5, Total Supply Voltage(Min)(+5V is 5, +/-5V is 10)=2.3, CMRR(Min)(dB)=70, Code_JEDEC=MS-012, ComponentLink1Description="Manufacturer URL", ComponentLink1URL=http://www.ti.com/, ComponentLink2Description=Datasheet, ComponentLink2URL=http://www.ti.com/lit/ds/symlink/opa2347.pdf, ComponentLink3Description="Package Specification", ComponentLink3URL=http://www.ti.com/litv/pdf/msoi002j, DatasheetVersion=SBOS167D, Eco-Plan="Green (RoHS & no Sb/Br)", GBW(Typ)(MHz)=0.35, IIB(Max)(pA)=10, Iq per channel(Max)(mA)=0.034, Mounting Technology="Surface Mount", Number of Channels=2, Offset Drift(Typ)(uV/C)=3, PackageDescription="8-Pin Plastic Small Outline, Body 4.9 x 3.9 mm, Pitch 1.27 mm", PackageReference=D0008A, PackageVersion="4040047-3/M, 06/2011", Packing=TUBE, Partnumber=OPA2347UA, Slew Rate(Typ)(V/us)=0.17, Sub Family="Low Input Bias Current Amp (<=10pA), Low Power Amp (<=500uA), Low Supply Voltage Amplifier (<=2.7V), Precision Amplifier", Vio (25C)(Max)(mV)=6
U5: library part IN-LNTX-DP83848VYB
VR1 VR2: library part CMP-1747-00004-1, "Square Trimpot(R) Trimming Potentiometer, 10 KOhm, 300 V, -55 to 125 degC, 3-Pin THD, RoHS, Tube", Case/Package=1206, Case Code (Imperial)=0612, Case Code (Metric)=1632, Max Operating Temperature=125degC, Min Operating Temperature=-25degC, Package Quantity=5000, Power Rating="1 W", Resistance="50 mohm", Tolerance=1%, Voltage Rating="220 mV", ComponentLink1Description="Manufacturer URL", ComponentLink1URL=http://www.bourns.com/, ComponentLink2Description=Datasheet, ComponentLink2URL=http://www.bourns.com/docs/Product-Datasheets/3362.pdf, DatasheetVersion=May-16, Height="0.6 mm", Length="3.2 mm", Mount="Surface Mount", PackageDescription="3-Pin Through Hole Device, Body 6.6 x 6.99 mm, Pitch 2.54 mm", PackageReference=3326P, Packaging="Tape and Reel", Pins=2, REACH SVHC="No SVHC", RoHSCompliant=True, Width="1.6 mm"
W1 W3: "Jumper Wire", LatestRevisionDate=17-Jul-2002, LatestRevisionNote="Re-released for DXP Platform.", PackageDescription="Radial Cap, Thru-Hole; 2 Leads; 0.2 in Pin Spacing", PackageReference=RAD-0.2, Published=24-Mar-1999, Publisher="Altium Limited"
X1: library part CMP-2000-06193-1, "Low Profile Quartz Crystal, 8.0 MHz, 2-Pin SMD, RoHS, Tape and Reel", Case Height=4.3mm, Case Length=13.2mm, Case Width=4.8mm, Frequency Stability=50PPM, Load Capacitance=18pF, Manufacturer=ECS, Operating Temperature Range=-10Cto+70C, Package / Case=HC-49/US, Package Description="2-Pin Surface Mount Device, Body 11.4 x 4.8 mm, Height 4.3 mm", Package Reference=ECS-80-18-5PX-TR, Tolerance=30PPM, Brand=ECS, Datasheet URL=https://www.ecsxtal.com/store/pdf/csm-7x.pdf, Datasheet Version=05/2016, Dimensions=4.8mmWx13.2mmLx4.3mmH, Factory Pack Quantity=1000, Frequency=8MHz, Manufacturer URL=https://www.ecsxtal.com/, Mounting Style=SMD/SMT, Mounting Technology=SurfaceMount, Packaging=Reel, Product Category=Crystals, RoHS=Details, Series=CSM-7X, Termination Style=SMD/SMT, Type=SMDQuartzCrystals
X2: library part CMP-0269-00001-1, "OSC, 50.000 MHZ, ± 25 ppm, 3.3 V, SMT", Frequency Stability="± 25 ppm(-10 to +70 degC)", Operating Temperature Range="-40 to 85 degC", Storage Temperature="-50 to 125 degC", Body Shape="Rectangular, 4 SMD", ComponentLink1Description="Manufacturer URL", ComponentLink1URL=http://www.txccrystal.com/, ComponentLink2Description=Datasheet, ComponentLink2URL=http://www.txccrystal.com/images/pdf/7w-tight.pdf, Mounting Technology="Surface Mount", PackageDescription="4-Pin SMT LED, 7 x 5 mm Body", PackageReference=L500W700H130-4, Partnumber=7W-50.000MBA-T, Rise/Fall Time="7 ns"

## Free pads (board coordinates)
  round 1.524 hole 3.73: MEC1(30.25,50.495) MEC1(30.25,106.985) MEC1(128.25,106.98)

## Via types
v1: diameter 0.7, hole 0.35, Top Layer to Bottom Layer, 126 vias
v2: diameter 0.65, hole 0.3, Top Layer to Bottom Layer, 49 vias

## Nets (pads, with @x,y where several pads share a name; then routed paths per layer and width w, separated by ;. In a path a pad name is that pad's centre, name@x,y a point inside that pad or via, vN(x,y) a via of type N, cw(c..) or ccw(c..) an arc to the next point about the centre after c; other vN are vias at no path point)
3V3: C1.2 C2.2 C3.2 C4.2 C5.2 C17.2 C18.2 C19.2 C20.2 C21.2 C22.2 C23.2 H1.2 J3.2 J3.6 P1.2 R2.1 R3.1 R4.1 R5.1 R9.1 R13.1 R21.1 R22.1 R23.1 R24.1 R25.1 R26.1 R27.1 R28.1 R29.1 R30.1 R31.1 R32.1 R33.1 R34.1 R35.1 TP6.1 U1.10 U1.19 U1.26 U1.35 U1.38 U1.57 U4.12 U4.13 U4.14 U4.15 U5.22 U5.32 U5.48 VR1.3 X2.4 | length 427.4
  Top Layer w0.3: VR1.3 53.629,96.276 53.645,96.291 ; H1.2 53.645,124.943 53.645,96.291 ; R9.1 v1(89.535,38.76) ; R5.1 111.999,75.149 91.916,75.149 R4.1 72.695,75.055 R3.1 72.378,74.993 R2.1 53.645,96.291 ; v1(125.654,69.444) 128.016,69.444 TP6.1
  Bottom Layer w0.3: R13.1 81.356,50.522 81.383,50.495 81.383,56.172 X2.4 81.981,56.77 C20.2@85.255,56.77 ; R21.1 81.409,48.362 R28.1 81.434,46.861 v1(89.535,38.76) 89.56,38.786 95.021,38.786 R24.1 ; R29.1 R23.1 C20.2@85.255,56.77 ; C4.2@89.179,77.978 C4.2@89.497,77.978 ; C4.2 89.179,78.537 89.383,78.74 91.516,78.74 U1.10 92.393,78.728 94.303,80.638 94.303,81.944 ; C3.2 93.802,85.268 94.303,84.767 U1.19 94.303,81.944 ; C3.2@94.005,86.538 C3.2@94.244,86.299 ; C21.2@94.26,45.822 94.26,49.782 U5.22 94.271,51.252 93.929,51.594 93.929,53.772 93.107,54.594 90.46,54.594 88.284,56.77 C20.2@85.255,56.77 ; R22.1 101.168,61.874 C23.2@101.219,61.925 ; 95.047,38.76 97.079,38.76 ; R25.1 97.053,38.786 97.079,38.76 ; U5.48 99.347,57.894 101.219,59.766 C23.2@101.219,61.925 ; R35.1 101.117,38.76 ; U1.38@102.553,79.223 104.14,79.223 105.435,79.248 107.747,79.248 C5.2 115.951,79.273 116.611,78.613 116.611,65.913 ; U1.38 101.346,79.228 ; U1.35 101.327,80.728 ; R34.1 R33.1 R32.1 105.015,53.078 R26.1 105.183,53.277 111.516,53.277 ; J3.2 111.578,57.078 111.557,57.099 ; J3.6 111.525,53.268 111.516,53.277 ; U4.15 U4.15@120.155,70.587 ; C17.2 122.136,69.444 ; P1.2 101.371,87.173 ; 94.303,81.944 97.286,81.944 97.803,82.462 U1.26 C1.2 98.019,86.538 98.654,87.173 101.371,87.173 ; 97.079,38.76 101.117,38.76 ; 101.117,38.76 121.945,38.76 122.479,39.294 122.479,44.094 124.384,45.999 126.644,45.999 127.787,47.142 127.787,66.167 127.342,66.612 R31.1 126.234,68.863 v1(125.654,69.444) 122.136,69.444 ; C23.2@101.219,61.925 101.219,62.687 97.155,66.751 C2.2 96.803,67.382 U1.57 96.803,75.205 v1(96.774,75.235) 100.767,79.228 101.346,79.228 ; 101.327,80.728 101.327,79.247 101.346,79.228 ; 101.327,80.728 101.327,87.129 101.371,87.173 ; 111.516,53.277 111.557,53.319 111.557,57.099 ; 111.557,57.099 111.557,58.064 116.611,63.119 116.611,65.913 ; 116.611,65.913 116.637,65.888 C18.2 U4.15@120.155,70.587 ; U4.15@120.155,70.587 U4.14 U4.13 U4.12 122.123,69.457 122.136,69.444
5V: C16.2 J2.1 Q1.2 R1.2 TP9.1 U1.34 U2.4 U3.8 U4.2 U4.3 U4.4 U4.5 U4.7 | length 152.5
  Top Layer w0.2: v2(86.792,60.313) 106.846,60.313 117.297,70.764 v2(117.297,81.255) ; Q1.2 119.979,112.786 120.65,112.116 R1.2 122.098,112.116 125.933,108.28 v2(125.933,87.274) 125.959,87.3 TP9.1
  Bottom Layer w0.2: U3.8 60.29,56.709 63.895,60.313 U2.4 v2(86.792,60.313) ; U1.34 122.682,81.228 ; U4.2 U4.3 U4.4 U4.5 122.123,77.622 122.276,77.775 122.682,77.775 ; U4.7 123.444,77.572 123.241,77.775 122.682,77.775 ; 125.933,81.253 v2(125.933,87.274) ; J2.1@127.718,81.082 127.572,81.228 122.682,81.228 ; 122.682,77.775 C16.2 122.682,81.228
CMD_SW: U1.51 U2.6 | length 46
  Top Layer w0.2: v2(63.297,61.595) 65.938,64.237 95.123,64.237 99.813,68.926 99.813,70.907 v2(99.803,70.917)
  Bottom Layer w0.2: U2.6 63.285,61.583 v2(63.297,61.595) ; v2(99.803,70.917) U1.51
COM: C11.2 Q4.1 R12.1 R14.2 U2.1 U3.2 | length 26.6
  Top Layer w0.2: v2(71.222,59.411) v2(71.222,61.214)
  Bottom Layer w0.2: C11.2 65.194,67.984 R12.1 ; U3.2@65.463,55.454 U3.2 67.25,55.439 v2(71.222,59.411) ; R14.2 65.31,67.869 R12.1 ; v2(71.222,61.214) 71.199,61.237 Q4.1 65.39,64.217 65.294,64.313 R12.1
Eth_CRS_DV: U1.62 U5.40 | length 15.3
  Bottom Layer w0.2: U1.62 94.303,64.306 93.65,63.652 93.65,60.808 94.771,59.686 U5.40
Eth_MDC: U1.30 U5.31 | length 36.9
  Top Layer w0.2: v2(88.773,55.397) v2(88.773,59.487)
  Bottom Layer w0.2: v2(88.773,55.397) 90.076,54.094 U5.31 ; v2(88.773,59.487) 88.773,62.119 88.782,62.128 88.782,62.341 88.833,62.341 89.154,62.661 89.154,70.661 91.585,73.092 92.345,73.092 99.803,80.55 U1.30
Eth_MDIO: R23.2 U1.49 U5.30 | length 34.5
  Top Layer w0.2: v2@89.514,53.67 v2(89.611,53.67) 94.717,58.776 v2(102.006,58.776)
  Bottom Layer w0.2: R23.2 86.959,54.61 88.671,54.61 v2(89.611,53.67) 89.687,53.594 U5.30 ; U1.49 101.156,72.453 102.133,71.476 102.133,58.903 v2(102.006,58.776)
Eth_PWRDOWN/INT: R26.2 U1.45 U5.7 | length 27.7
  Bottom Layer w0.2: U5.7 103.068,53.594 R26.2@103.299,53.363 ; U1.45 103.85,75.728 104.165,75.413 104.165,54.229 R26.2@103.299,53.363 ; R26.2 R26.2@103.299,53.363
Eth_REF_CLK: R42.1 U1.63 U5.34 | length 20.5
  Bottom Layer w0.2: U5.34 90.304,55.594 89.651,56.246 89.651,64.023 93.818,68.19 93.818,72.438 U1.63
Eth_RX_D0: R40.1 U1.61 | length 10.8
  Bottom Layer w0.2: U1.61 94.803,66.715 97.536,63.983 R40.1
Eth_RX_D1: R41.1 U1.60 | length 11.3
  Bottom Layer w0.2: U1.60 95.303,66.951 96.225,66.029 99.212,63.043 R41.1
Eth_RX_ER: R39.1 U1.64 | length 10.8
  Top Layer w0.2: v2(93.193,68.529) 93.193,67.437 v2(95.021,65.608)
  Bottom Layer w0.2: v2@93.303,68.529 U1.64 ; v2(95.021,65.608) 95.885,64.745 R39.1
Eth_TX_D0: R36.1 U1.2 | length 40.6
  Top Layer w0.2: v2(87.782,62.967) 106.731,62.967 106.782,62.916 v2(106.858,62.992)
  Bottom Layer w0.2: v2(87.782,62.967) 87.757,62.992 87.757,72.009 88.423,72.675 90.476,74.728 U1.2 ; R36.1 105.609,56.638 106.858,57.887 v2(106.858,62.992)
Eth_TX_D1: R37.1 U1.3 | length 44.9
  Top Layer w0.2: v2(87.147,62.332) 107.518,62.332 v2(107.569,62.281)
  Bottom Layer w0.2: v2(87.147,62.332) 87.147,72.238 90.138,75.228 U1.3 ; R37.1 105.711,54.86 107.569,56.718 v2(107.569,62.281)
Eth_TX_EN: R38.1 U1.1 | length 36.2
  Top Layer w0.2: v2(88.417,63.602) 105.918,63.602 105.943,63.627 v2(105.943,63.551)
  Bottom Layer w0.2: v2(88.417,63.602) 88.417,72.034 90.611,74.228 U1.1 ; R38.1 105.685,58.416 105.943,58.674 v2(105.943,63.551) v2@105.943,63.754
GND: C1.1 C2.1 C3.1 C4.1 C5.1 C6.2 C7.2 C8.2 C9.1 C13.1 C16.1 C17.1 C18.1 C19.1 C20.1 C21.1 C22.1 C23.1 C24.1 C25.1 C26.1 C27.1 H1.1 J1.2 J2.5 J3.8 J3.S1 J3.S2 P1.3 Q3.2 Q4.2 R6.1 R8.1 R18.2 R20.2 R43.2 S1.1 S1.3 S2.1 S2.3 S3.1 S3.3 S4.1 S4.3 S5.1 S5.3 TP7.1 TP8.1 U1.9 U1.20 U1.25 U1.41 U2.7 U3.4 U4.10 U4.11 U4.17 U5.6 U5.15 U5.19 U5.35 U5.36 U5.47 U5.49 VR1.1 X2.2 | length 85.1
  Top Layer w0.2: v1(122.401,102.895) R8.1 ; Q3.2@122.401,107.116 Q3.2 123.511,107.128 v1(123.52,107.137)
  Top Layer w0.3: VR1.1 33.258,96.276 v1(33.274,96.291) ; v1(39.954,29.159) 39.954,30.937 TP8.1 ; J1.2 44.252,52.431 44.298,52.476 v1(44.12,52.476) ; S1.3@45.911,73.325 S1.3 47.261,73.262 v1(47.269,73.254) ; S1.1 v1(47.193,65.312) ; v1(50.317,124.104) H1.1 ; S2.1 64.812,65.507 v1(66.167,65.507) ; S2.3 64.902,73.558 v1(66.497,73.558) ; S3.1 85.314,65.375 v1(85.319,65.38) ; S3.3 85.39,73.325 v1(85.395,73.33) ; C9.1 v1(94.234,37.541) ; S5.3 v1(100.929,29.21) ; S5.1 100.94,35.892 v1(100.94,34.671) ; S4.1 v1(105.41,65.375) ; S4.3 v1(105.359,73.325) ; v1(118.518,44.399) J3.S2 ; J3.S1 v1(118.518,63.449) ; TP7.1 119.126,29.667 v1(119.151,29.642) ; v1(119.776,119.532) 119.776,120.54 R6.1 ; v1(122.606,89.713) P1.3
  Bottom Layer w0.2: U1.9 v1(93.036,78.228) ; v1(94.771,85.293) 94.803,85.261 U1.20
  Bottom Layer w0.3: v1(58.42,48.26) 58.444,48.236 R20.2 ; U2.7 v1(62.011,62.853) ; U3.4 v1(66.827,52.899) ; C13.1 71.145,53.841 v1(71.145,54.889) ; Q4.2 v1(72.161,66.116) v1(72.161,66.116) ; v1(73.381,54.94) 73.381,54.001 R18.2 ; X2.2@77.718,61.849 X2.2 79.674,61.818 79.654,61.798 v1(79.477,61.798) ; C20.1 86.78,58.205 v1(86.792,58.217) 86.804,58.205 C22.1 ; v1(86.538,78.232) 87.575,78.232 C4.1 ; v1(86.741,46.482) R43.2 ; v1(89.992,44.45) 89.996,44.446 C26.1 ; v1(90.932,47.625) 90.941,47.616 C27.1 ; C24.1 v1(91.415,64.872) ; U5.35 v1(91.971,57.379) ; v1(95.521,53.344) 95.521,52.281 95.539,52.299 v1(95.555,52.299) ; v1(95.521,54.344) 95.529,54.352 v1(95.529,55.524) ; C21.1 v1(96.521,45.847) ; U5.19 95.771,48.374 v1(96.19,47.955) ; v1(96.521,53.344) 97.659,53.344 v1(97.663,53.34) ; v1(96.521,54.344) v1(97.663,54.344) ; U5.15 v1(97.771,51.257) ; v1(97.79,89.332) 97.79,88.151 C1.1 ; C2.1 99.746,67.031 v1(99.771,67.005) ; v1(99.085,40.361) C25.1 ; C7.2 v1(100.635,68.91) ; v2(100.934,77.876) 101.083,77.728 U1.41 ; C5.1 107.823,77.724 v1(109.093,77.724) ; v1(109.906,73.635) 109.931,73.66 C6.2 ; C8.2 v1(109.931,71.552) ; C19.1 v1(116.256,41.453) ; J3.S2@119.124,46.167 J3.S2@119.151,46.14 ; v1(119.583,73.558) U4.17@121.806,73.558 ; v1(119.939,79.426) 121.057,79.426 C16.1 ; C18.1 v1(122.707,65.888) ; U4.17@122.797,72.568 U4.17@121.806,73.558 ; C17.1 123.736,67.094 v1(123.749,67.081) ; v1(123.977,73.558) U4.17@121.806,73.558 ; v1(126.477,78.537) 126.482,78.543 J2.5 ; J2.5@127.689,78.562 J2.5@127.693,78.558
  other v1: 123.215,27.254 35.789,27.305 86.589,28.118 35.662,35.992 108.331,40.437 90.758,40.742 104.93,44.475 35.458,44.526 76.2,46.228 131.826,46.863 100.784,49.014 84.633,49.218 89.459,49.325 101.969,51.511 122.072,54.712 83.515,54.86 28.27,56.312 101.129,57.785 79.781,58.522 90.983,59.461 39.395,62.493 131.826,66.345 120.693,72.382 121.793,72.382 122.893,72.382 120.693,73.482 121.793,73.482 122.893,73.482 39.395,73.965 28.27,73.99 120.693,74.582 121.793,74.582 122.893,74.582 78.27,79.728 57.734,80.162 107.772,84.411 111.15,90.83 50.851,91.211 85.7,91.389 69.062,91.465 131.547,94.64 43.51,95.25 51.486,104.445 83.693,105.766 105.207,105.766 28.042,111.1 131.547,111.277 36.017,113.589 67.183,115.138 51.791,115.24 84.607,115.24 109.499,115.672 35.839,122.784 99.466,124.511 35.789,130.327 47.142,130.556 122.149,130.734 63.271,130.785 83.464,130.81 102.489,130.912
NetC6_1: C6.1 U1.39 X1.2 | length 12.8
  Bottom Layer w0.2: U1.39 104.165,78.728 106.795,76.098 X1.2
NetC7_1: C7.1 U1.56 | length 3.9
  Bottom Layer w0.2: U1.56 97.303,69.905 98.07,69.139 C7.1
NetC8_1: C8.1 U1.40 X1.1 | length 20.4
  Bottom Layer w0.2: U1.40 103.661,78.228 106.858,75.032 106.858,71.044 109.042,68.86 C8.1 113.639,68.86 X1.1@114.248,68.251 ; X1.1@114.248,68.834 X1.1@114.248,68.251 ; X1.1 114.248,66.65 X1.1@114.248,68.251
NetC9_2: C9.2 R9.2 R10.1 S5.2 S5.4 | length 18.2
  Top Layer w0.2: R10.1 89.484,35.966 89.51,35.941 C9.2 92.951,35.903 S5.2 S5.4
NetC10_1: C10.1 C11.1 R11.2 R12.2 R15.1 TP4.1 W1.2 | length 42
  Top Layer w0.2: W1.2 52.248,68.402 53.365,69.52 TP4.1 56.845,69.52 v2(56.871,69.545)
  Bottom Layer w0.2: v2(56.871,69.545) 58.397,69.545 C10.1 R11.2 C11.1 R12.2 ; R12.2@65.313,69.603 R15.1
NetC10_2: C10.2 R11.1 TP1.1 U2.8 | length 11.2
  Top Layer w0.2: TP1.1 57.912,64.135 v2(57.937,64.16)
  Bottom Layer w0.2: v2(57.937,64.16) 60.367,64.16 U2.8 R11.1 60.304,67.984 C10.2
NetC12_1: C12.1 C14.2 R16.2 U3.7 | length 9.7
  Bottom Layer w0.2: C14.2 53.236,55.677 R16.2 53.314,55.655 C12.1 ; C12.1@56.058,55.566 59.671,55.566 U3.7
NetC12_2: C12.2 R16.1 U3.6 VR2.2 VR2.3 | length 51.5
  Bottom Layer w0.2: VR2.3 32.953,82.591 34.468,81.077 VR2.2 34.468,61.214 41.677,54.005 R16.1 53.462,54.204 55.909,54.204 C12.2 56.172,54.169 U3.6
NetC13_2: C13.2 R13.2 R18.1 TP2.1 W2.3 | length 15.1
  Top Layer w0.2: v2(71.171,50.546) TP2.1 71.171,43.815 W2.3
  Bottom Layer w0.2: v2(71.171,50.546) 71.143,50.574 C13.2 R18.1 ; R18.1@73.459,52.222 R13.2
NetC14_1: C14.1 J1.1 | length 6.2
  Bottom Layer w0.2: J1.1 48.285,55.931 C14.1
NetC15_1: C15.1 R20.1 U3.5 W3.2 | length 12.7
  Bottom Layer w0.2: U3.5 59.798,49.968 R20.1 C15.1 61.798,49.911 W3.2
NetC15_2: C15.2 U3.3 W2.2 W3.1 | length 25.5
  Top Layer w0.2: W3.1 65.338,41.317 74.159,41.317 W2.2
  Bottom Layer w0.2: W3.1 63.652,43.002 63.652,49.708 C15.2 63.424,53.492 64.1,54.169 U3.3
NetC24_2: C24.2 C25.2 C26.2 C27.2 U5.18 U5.23 U5.37 | length 33.6
  Top Layer w0.2: v2(93.98,44.475) 99.052,44.475 99.081,44.446 v2(99.085,44.45)
  Bottom Layer w0.2: C24.2 91.415,60.716 93.271,58.859 93.271,55.7 94.474,54.497 94.474,52.515 95.291,51.698 95.317,51.698 96.271,50.744 96.271,48.864 99.085,46.05 v2(99.085,44.45) C25.2 ; U5.23 93.771,47.924 92.541,46.694 C27.2 C26.2 92.571,44.475 v2(93.98,44.475)
NetD1_1: D1.1 R27.2 U5.27 | length 10.7
  Bottom Layer w0.2: R27.2 83.058,52.857 84.303,51.613 85.853,51.613 D1.1 ; D1.1@86.945,50.796 87.127,50.978 89.317,50.978 90.433,52.094 U5.27
NetD1_2: D1.2 R21.2 | length 1.8
  Bottom Layer w0.2: R21.2 84.82,50.495 D1.2 ; D1.2@84.841,50.8 D1.2@84.845,50.796
NetH1_3: H1.3 VR1.2 | length 35.6
  Bottom Layer w0.2: VR1.2 34.468,104.47 55.397,125.4 H1.3
NetH1_4: H1.4 U1.14 | length 59.8
  Bottom Layer w0.2: H1.4 57.937,112.725 89.935,80.728 U1.14
NetH1_5: H1.5 U1.13 | length 60
  Top Layer w0.2: v2(60.477,108.509) H1.5
  Bottom Layer w0.2: v2(60.477,108.509) 88.758,80.228 U1.13
NetH1_6: H1.6 U1.12 | length 60
  Top Layer w0.2: v2(62.992,104.496) 63.017,104.521 H1.6
  Bottom Layer w0.2: v2(62.992,104.496) 87.76,79.728 U1.12
NetH1_11: H1.11 U1.11 | length 56.3
  Top Layer w0.2: v2(75.667,89.738) 75.667,125.578 75.616,125.628 H1.11
  Bottom Layer w0.2: v2(75.667,89.738) 86.177,79.228 U1.11
NetH1_12: H1.12 U1.17 | length 48.5
  Bottom Layer w0.2: H1.12 91.719,112.268 91.719,85.852 93.303,84.268 U1.17
NetH1_13: H1.13 U1.18 | length 47.6
  Bottom Layer w0.2: H1.13 80.797,125.12 92.541,113.377 92.541,85.864 93.803,84.602 U1.18
NetH1_14: H1.14 U1.21 | length 47.3
  Bottom Layer w0.2: H1.14 95.469,113.598 95.469,89.056 95.453,89.04 95.453,84.633 95.303,84.483 U1.21
NetH1_15: H1.15 Q2.3 | length 35.4
  Top Layer w0.2: H1.15 87.181,127.033 Q2.3
NetH1_16: H1.16 Q3.3 | length 39.9
  Top Layer w0.2: H1.16 105.02,109.128 Q3.3
NetJ3_1: J3.1 R35.2 U5.17 | length 39.2
  Bottom Layer w0.2: U5.17 96.771,48.978 99.374,46.376 99.42,46.376 101.117,44.679 R35.2 101.219,42.996 111.576,42.996 118.262,49.682 118.262,56.312 116.226,58.348 J3.1 ; J3.1@115.599,58.374 J3.1@115.808,58.374
NetJ3_3: J3.3 R34.2 U5.16 | length 30.3
  Bottom Layer w0.2: U5.16 97.271,48.978 99.524,46.726 R34.2 114.302,46.726 117.704,50.128 117.704,53.323 J3.3
NetJ3_5: J3.5 R33.2 U5.14 | length 30.5
  Bottom Layer w0.2: U5.14 98.271,48.769 99.64,47.401 103.315,47.401 ; R33.2 103.315,47.401 ; J3.5 112.688,54.547 115.709,54.547 117.094,53.162 117.094,50.343 115.792,49.041 114.152,47.401 103.315,47.401
NetJ3_7: J3.7 R32.2 U5.13 | length 16.5
  Top Layer w0.2: v2(104.242,49.794) 110.474,49.794 J3.7 ; J3.7@113.059,51.783 J3.7@113.059,52.024
  Bottom Layer w0.2: U5.13 103.315,49.794 ; R32.2 103.315,49.794 ; v2@104.257,49.794 v2(104.242,49.794) 103.315,49.794
NetJ3_9: J3.9 R29.2 U5.28 | length 47
  Top Layer w0.2: v2(93.294,52.629) 97.828,48.095 114.055,48.095 125.538,59.579 125.538,60.438 J3.9 ; J3.9@125.832,60.135 J3.9@126.234,60.537
  Bottom Layer w0.2: R29.2 87.189,52.594 93.329,52.594 v2(93.294,52.629)
NetJ3_10: J3.10 R31.2 | length 7.7
  Bottom Layer w0.2: J3.10 126.695,59.055 126.695,64.694 126.477,64.912 R31.2
NetJ3_11: J3.11 R28.2 U5.26 | length 59.8
  Bottom Layer w0.2: U5.26 90.685,51.594 87.427,48.336 R28.2 83.134,47.447 88.316,42.265 112.471,42.265 120.294,50.089 125.628,50.089 J3.11 ; J3.11@125.764,50.089 126.026,49.827 J3.11@126.234,49.827
NetJ3_12: J3.12 R30.2 | length 9.4
  Bottom Layer w0.2: R30.2 120.701,43.383 124.605,47.287 124.614,47.278 J3.12
NetQ1_1: Q1.1 Q2.2 R1.1 | length 11
  Top Layer w0.2: Q2.2 121.869,124.64 121.869,118.768 Q1.1@121.791,118.689 ; R1.1 121.869,118.59 Q1.1
NetQ1_3: Q1.3 Q2.1 R6.2 | length 9.5
  Top Layer w0.2: Q2.1 119.812,124.798 R6.2 120.726,122.276 120.955,122.047 120.955,116.604 Q1.3@120.752,116.4
NetQ3_1: Q3.1 R7.1 R8.2 | length 5.5
  Top Layer w0.2: Q3.1 120.701,106.94 R8.2 R7.1
NetQ4_3: Q4.3 R19.2 | length 2.1
  Bottom Layer w0.2: Q4.3 73.883,64.483 R19.2
NetR7_2: R7.2 U1.22 | length 35.3
  Top Layer w0.2: v2(118.72,99.797) 120.498,99.797 R7.2 120.955,100 R7.2@120.701,99.746
  Bottom Layer w0.2: U1.22 95.803,88.539 107.061,99.797 v2(118.72,99.797)
NetR15_2: R15.2 VR2.1 | length 32
  Bottom Layer w0.2: VR2.1 45.634,73.965 65.02,73.965 R15.2
NetR17_2: R17.2 R19.1 TP5.1 W2.1 | length 31.6
  Top Layer w0.2: W2.1 v2(77.724,63.551) ; v2(78.816,66.446) 78.867,66.396 80.62,66.396 TP5.1
  Bottom Layer w0.2: R19.1 75.032,66.192 75.235,66.396 77.218,66.396 R17.2 ; v2(77.724,63.551) 77.724,65.889 R17.2 ; v2(78.816,66.446) 78.765,66.396 77.621,66.396 R17.2
NetR22_2: R22.2 U5.39 | length 4.6
  Bottom Layer w0.2: R22.2 92.774,60.833 94.271,59.336 U5.39
NetR24_2: R24.2 U5.21 | length 6.8
  Bottom Layer w0.2: U5.21 94.771,43.348 R24.2
NetR25_2: R25.2 U5.20 | length 7.5
  Bottom Layer w0.2: U5.20 95.271,48.036 95.59,47.717 95.59,47.707 95.941,47.355 95.952,47.355 97.121,46.185 97.121,43.166 R25.2
NetR36_2: R36.2 U5.3 | length 3.7
  Bottom Layer w0.2: U5.3 101.466,55.594 102.51,56.638 R36.2
NetR37_2: R37.2 U5.4 | length 3.3
  Bottom Layer w0.2: U5.4 103.065,55.094 R37.2
NetR38_2: R38.2 U5.2 | length 4.4
  Bottom Layer w0.2: U5.2 101.319,56.094 103.299,58.074 R38.2
NetR39_2: R39.2 U5.41 | length 3.4
  Bottom Layer w0.2: U5.41 95.271,59.457 95.885,60.071 R39.2
NetR40_2: R40.2 U5.43 | length 3.8
  Bottom Layer w0.2: U5.43 96.271,60 97.321,61.05 R40.2
NetR41_2: R41.2 U5.44 | length 4.3
  Bottom Layer w0.2: U5.44 96.771,58.856 98.436,60.521 98.436,60.523 98.988,61.075 R41.2@99.212,61.075
NetR42_2: R42.2 X2.3 | length 6.3
  Bottom Layer w0.2: X2.3 82.604,61.163 87.655,61.163 R42.2
NetR43_1: R43.1 U5.24 | length 5.9
  Bottom Layer w0.2: R43.1 89.394,47.561 91.628,49.794 U5.24
NetU3_1: U3.1 W1.1 | length 20.8
  Top Layer w0.2: W1.1 54.788,49.505 v2(62.001,56.718)
  Bottom Layer w0.2: v2(62.001,56.718) 62.011,56.709 U3.1
P_DCF: R14.1 R17.1 TP3.1 U1.50 | length 35.7
  Top Layer w0.2: TP3.1 73.787,68.072 v2(75.59,68.072) ; v2(83.388,67.996) 85.598,70.206 v2(99.162,70.206)
  Bottom Layer w0.2: R14.1 69.901,68.072 v2(75.59,68.072) 77.241,68.072 R17.1 77.521,67.996 v2(83.388,67.996) ; v2(99.162,70.206) 99.974,70.206 100.378,70.61 100.378,72.378 U1.50 U1.50@100.27,72.42
PGEC: P1.5 U1.15 | length 47.9
  Top Layer w0.2: v2(88.849,90.221) 93.421,94.793 P1.5
  Bottom Layer w0.2: v2(88.849,90.221) 88.849,82.652 90.273,81.228 U1.15
PGED: P1.4 U1.16 | length 44.5
  Top Layer w0.2: v2(89.651,89.281) 92.623,92.253 P1.4
  Bottom Layer w0.2: v2(89.651,89.281) 89.645,89.275 89.645,82.694 90.611,81.728 U1.16
RESET: P1.1 R10.2 U1.7 | length 78.6
  Top Layer w0.2: v2(85.979,62.636) 85.979,37.844 R10.2 R10.2@86.436,37.946 ; v2(93.472,77.216) 98.603,82.347 121.768,82.347 P1.1
  Bottom Layer w0.2: v2(85.979,62.636) 85.979,72.822 90.385,77.228 U1.7 93.46,77.228 v2(93.472,77.216)
SW1: R2.2 S1.2 S1.4 U1.44 | length 63
  Top Layer w0.2: S1.2 S1.4 53.615,73.262 R2.2 53.862,73.076 62.535,73.076 64.151,71.459 96.758,71.459 99.67,74.371 v2(99.746,74.371)
  Bottom Layer w0.2: v2(99.746,74.371) 99.66,74.371 101.517,76.228 U1.44
SW2: R3.2 S2.2 S2.4 U1.43 | length 43.9
  Top Layer w0.2: S2.2 69.306,70.703 v2(69.317,70.714) ; v2(69.306,72.034) S2.4 80.665,73.462 82.194,71.933 96.139,71.933 v2(98.679,74.473)
  Bottom Layer w0.2: v2(69.306,72.034) 69.317,72.024 v2(69.317,70.714) ; v2(98.679,74.473) 100.934,76.728 U1.43
SW3: R4.2 S3.2 S3.4 U1.42 | length 26.3
  Top Layer w0.2: S3.2 v2(90.119,65.375) ; S3.4 R4.2@91.823,73.325 ; v2(91.823,72.517) R4.2@91.823,73.325 ; R4.2 R4.2@91.823,73.325 ; v2(97.663,74.524) 96.465,73.325 R4.2@91.823,73.325
  Bottom Layer w0.2: v2(90.119,65.375) 91.823,67.079 v2(91.823,72.517) ; v2(97.663,74.524) 97.46,74.524 100.164,77.228 U1.42
SW4: R5.2 S4.2 S4.4 U1.46 | length 22.6
  Top Layer w0.2: v2(100.66,74.371) 107.62,74.371 108.458,73.533 S4.4 ; S4.2 S4.4 ; R5.2 111.771,73.034 108.749,73.034 S4.4
  Bottom Layer w0.2: v2(100.66,74.371) 100.609,74.371 101.466,75.228 U1.46